# Altium PCB 2GHz_TDD_Driver.PcbDoc
Units mm, origin at the board's own origin, x right, y up, seen from the top; angles counter-clockwise.
Board outline 49.91 x 49.91 mm, 2 copper layers (Top Layer, Bottom Layer); 48 components, 28 nets, 151 pads, 10 vias.
Unrouted connection lines stored in the file: 23.
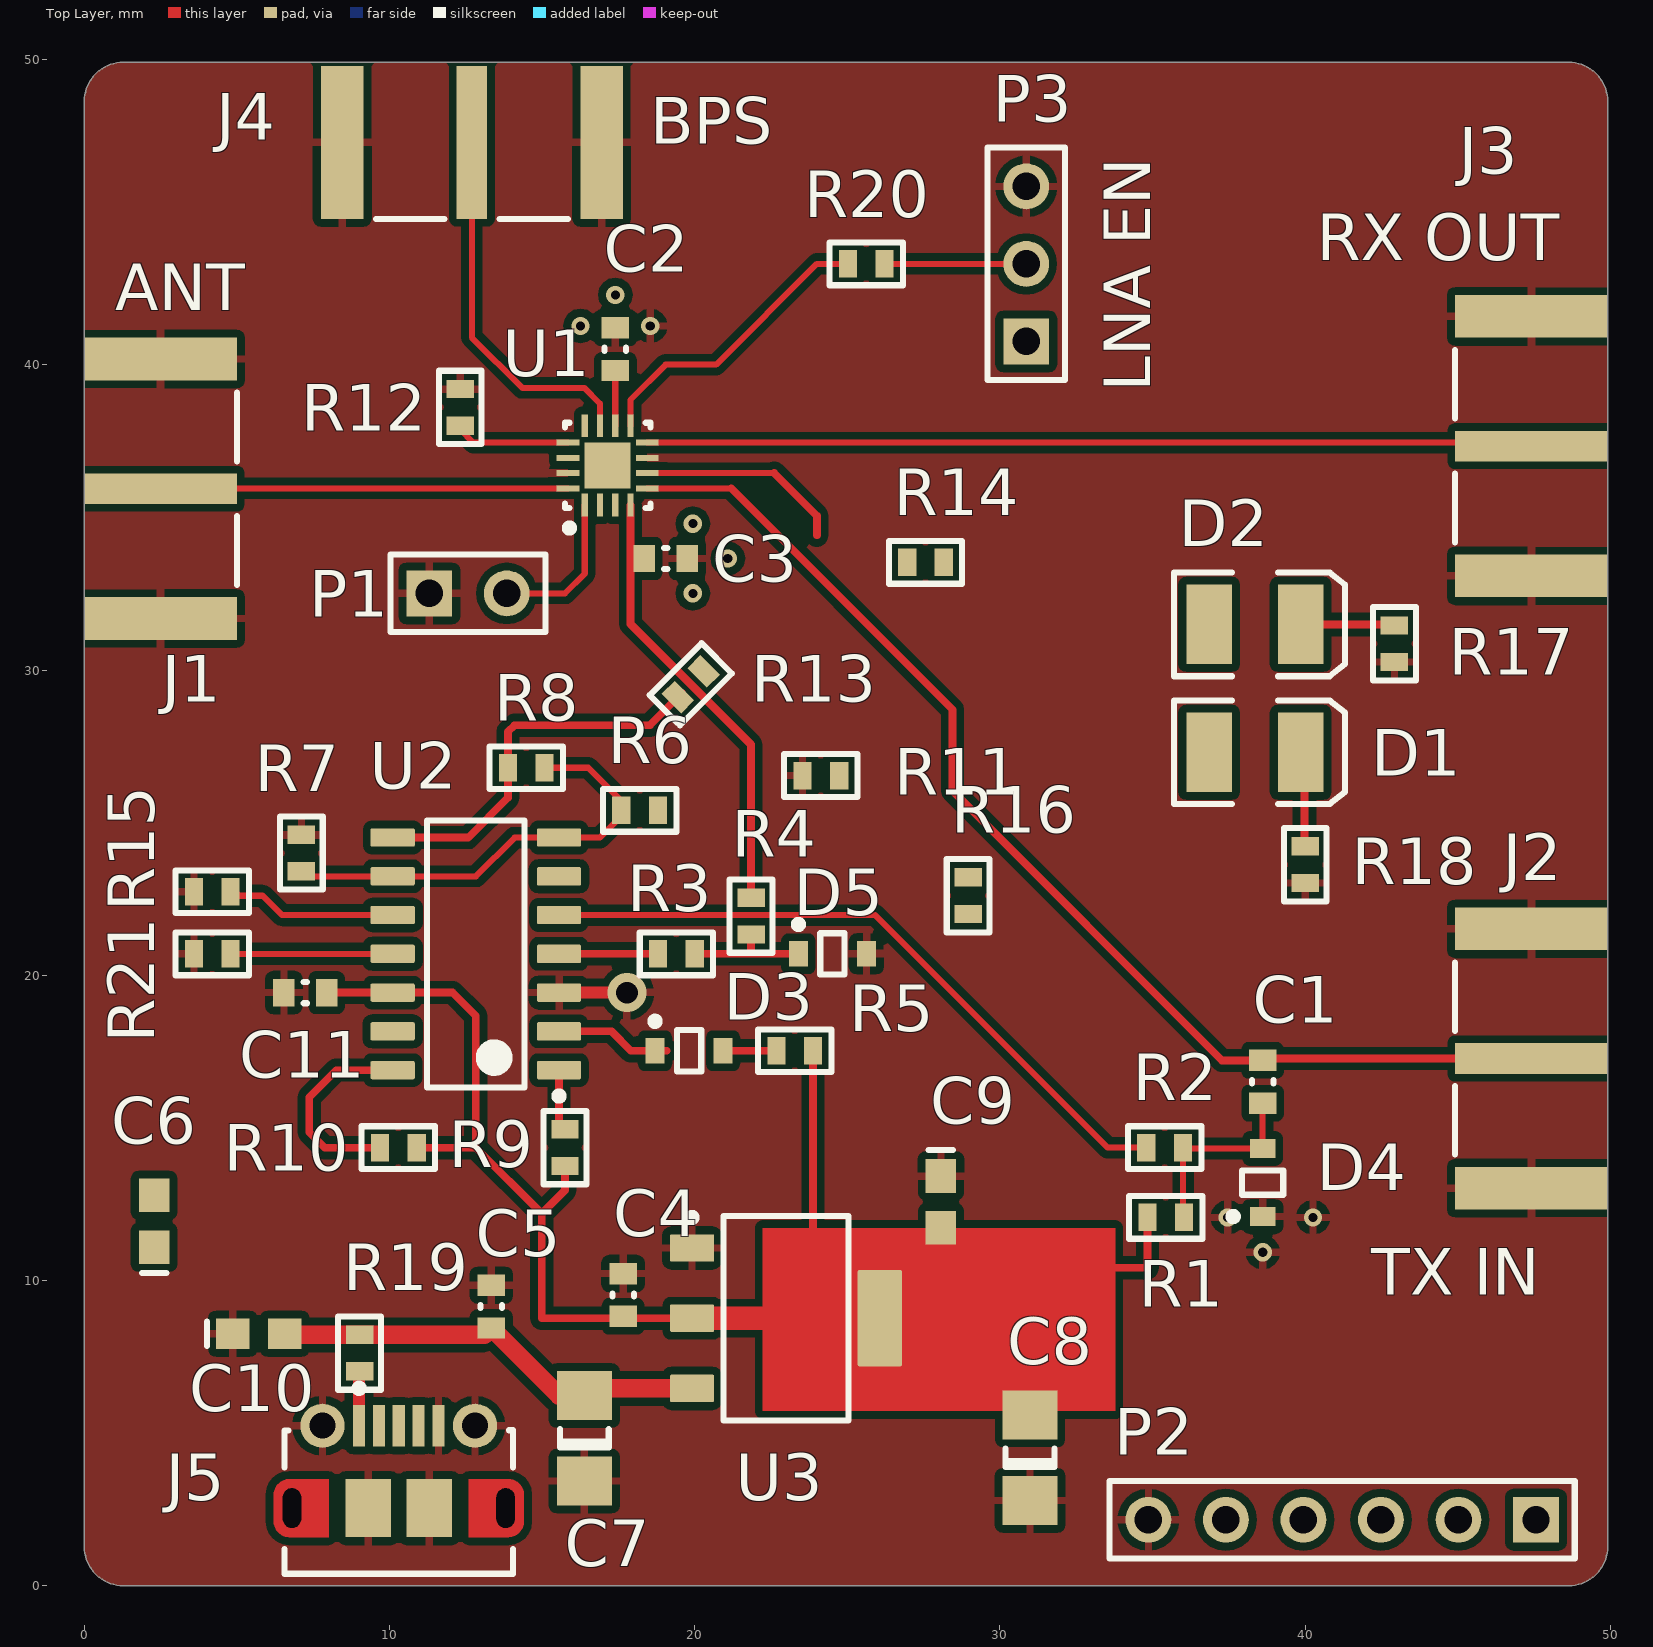
[diagram p0: Top Layer view]
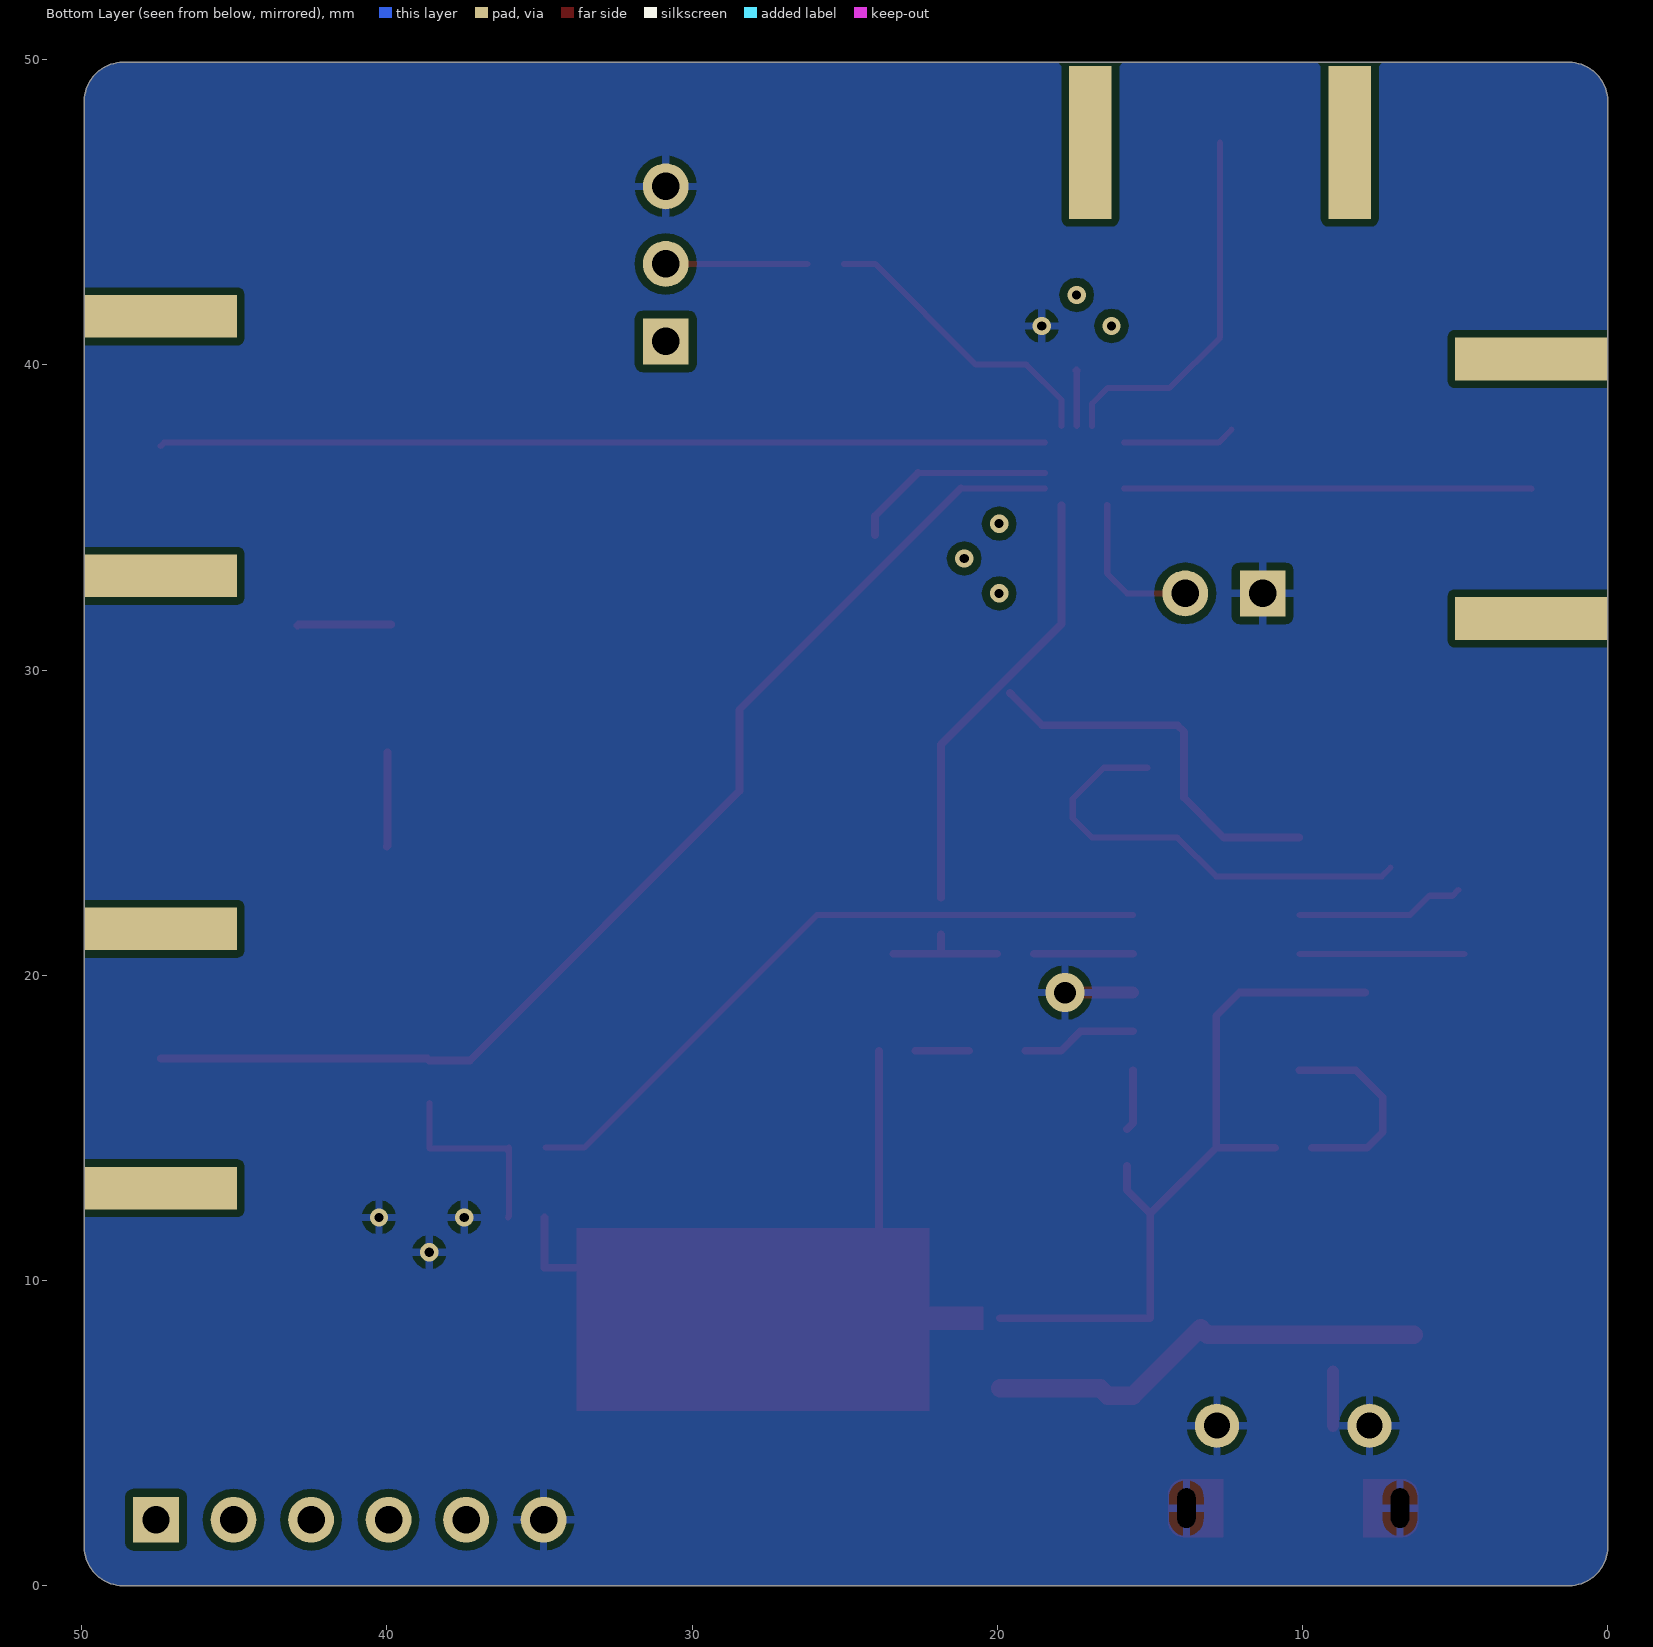
[diagram p1: Bottom Layer view, seen from below]

## Layer stack, top to bottom
Top Solder: solder mask 0.0102, Solder Resist, Dk 3.5
Top Layer: signal copper 0.0356
Dielectric 1: dielectric 0.32, FR-4, Dk 4.3
Bottom Layer: signal copper 0.0356
Bottom Solder: solder mask 0.0102, Solder Resist, Dk 3.5

## Board outline
0,1.27 0,48.641 cw(c1.27,48.641) 1.27,49.911 48.641,49.911 cw(c48.641,48.641) 49.911,48.641 49.911,1.27 cw(c48.641,1.27) 48.641,0 1.27,0 cw(c1.27,1.27)

## Design rules (kind name [scope] priority, off if disabled: settings)
Clearance [All] p1: gap=0.254 ignorepadtopadclearanceinfootprint=FALSE except(0: Arc-Hole Track-Hole SMDPad-Hole THPad-Hole Via-Hole Fill-Hole Poly-Hole Region-Hole Text-Hole; 0.15: Arc-Arc Arc-Track Arc-SMDPad Track-Track Track-SMDPad SMDPad-SMDPad)
PolygonConnect [All] p1: connectstyle=Relief reliefconductorwidth=0.254 reliefentries=4 polygonreliefangle="90 Angle" airgapwidth=0.254
RoutingVias [All] p1: holewidth=0.711 width=1.27 viastyle="Through Hole" minholewidth=0.711 minwidth=1.27 maxholewidth=0.711 maxwidth=1.27
SolderMaskExpansion [All] p1: expansion=0.102
Width [All] p1: maxlimit=3 minlimit=0.15 preferedwidth=0.254 bottomlayer_maxwidth=0.254 minimp=50.000000 maximp=50.000000 favimp=50.000000
30 further rules are at their usual default settings.

## Components (designator, comment, footprint, x,y, rotation, side; value= is the part's Value field where it differs from the comment)
C1 "CAP 1pF 50V 0603(1608)" CAPC0603(1608)100_L 38.608,16.51 r90 top value=1pF
C2 "100nF" CAPC0603(1608)100_L 17.399,40.513 r270 top
C3 "100nF" CAPC0603(1608)100_L 19.05,33.655 r0 top
C4 "100nF" CAPC0603(1608)100_L 17.653,9.525 r270 top
C5 "100nF" CAPC0603(1608)100_L 13.335,9.144 r270 top
C6 "C0603" 0603 2.286,11.938 r90 top value=100pF
C7 "C1206" 1206 16.383,4.826 r90 top value=22uF
C8 "C1206" 1206 30.988,4.191 r90 top value=22uF
C9 "C0603" 0603 28.067,12.573 r270 top value=2.2uF
C10 "C0603" 0603 5.715,8.255 r0 top value=470pF
C11 "100nF" CAPC0603(1608)100_L 7.239,19.431 r0 top
D1 "LED3" 3.5X2.8X1.9 38.354,27.305 r0 top
D2 "LED3" 3.5X2.8X1.9 38.354,31.496 r0 top
D3 "BAS16HT1G" ONSC-SOD-323-2-477-02_V 19.812,17.526 r0 top
D4 "MMDL301T1G" ONSC-SOD-323-2-477-02_V 38.608,13.208 r90 top
D5 "MMDL301T1G" ONSC-SOD-323-2-477-02_V 24.511,20.701 r0 top
J1 "32K145-400L5" ROS-32K145-400L5_V 0,35.941 r90 top
J2 "32K145-400L5" ROS-32K145-400L5_V 49.911,17.272 r270 top
J3 "32K145-400L5" ROS-32K145-400L5_V 49.911,37.338 r270 top
J4 "32K145-400L5" ROS-32K145-400L5_V 12.7,49.784 r0 top
J5 "105017-0001" USB-MICRO-B_V 10.303,3.89 r0 top locked
P1 "DET OUT" HDR1X2 11.303,32.512 r0 top
P2 "Header 6" HDR1X6 47.563,2.159 r180 top
P3 "LNA ENABLE" HDR1X3 30.861,40.767 r90 top
R1 "10k 0603" R0603 35.433,12.065 r0 top value=10k
R2 "10k 0603" R0603 35.398,14.351 r180 top value=10k
R3 "10k 0603" R0603 19.396,20.701 r180 top value=10k
R4 "10k 0603" R0603 21.844,21.936 r270 top value=10k
R5 "10k 0603" R0603 23.276,17.526 r0 top value=10k
R6 "10k 0603" R0603 18.196,25.4 r180 top value=10k
R7 "10k 0603" R0603 7.112,24.003 r270 top value=10k
R8 "10k 0603" R0603 14.478,26.797 r180 top value=10k
R9 "10k 0603" R0603 15.748,14.351 r270 top value=10k
R10 "10k 0603" R0603 10.287,14.351 r180 top value=10k
R11 "1M 0603" R0603 24.13,26.543 r0 top value=1M
R12 "10k 0603" R0603 12.319,38.608 r90 top value=10k
R13 "0R 0603" R0603 19.87,29.533 r45 top value=0R
R14 "0R 0603" R0603 27.559,33.528 r180 top
R15 "10k 0603" R0603 4.191,22.733 r0 top value=10k
R16 "100R 0603 1%" R0603 28.956,22.606 r90 top value=100R
R17 "100R 0603 1%" R0603 42.926,30.861 r90 top value=100R
R18 "100R 0603 1%" R0603 40.005,23.622 r270 top value=100R
R19 "0R 0603 1%" R0603 9.017,7.62 r270 top value=0R
R20 "10k 0603 1%" R0603 25.619,43.307 r0 top value=10k
R21 "10k 0603" R0603 4.191,20.701 r0 top value=10k
U1 "RFX8422S" QFN50P250X250X50_HS-17M 17.145,36.703 r90 top
U2 "LM339M" D0014A_N 12.827,20.701 r180 top locked
U3 "LM1117MPX-3.3" DCY0004A_L 22.987,8.763 r0 top locked

## Footprints (in the part's own frame and the unit in brackets; to place one, negate y for a bottom-side part, rotate by r counter-clockwise, add the part's x,y. Pads: shape width x height; smd on the part's side, far side on the other; paste and mask are expansions set on the pad)
3.5X2.8X1.9 [mm] "SM LED; 2 C-Bend Leads; Body 3.5 x 2.8 x 1.9 mm, inc leads (LxWxH typ)"
  rect 1.5x2.6 smd: 1(-1.5,0) 2(1.5,0)
  silkscreen extent -2.65,-1.7 2.95,1.7
0603 [mm] "Chip Capacitor; Body 1.6 x 0.8 mm (LxW typ)"
  rect 1.1x1 smd: 1(-0.85,0) 2(0.85,0)
  silkscreen extent -1.7,-0.4 -1.7,0.4
1206 [mm] "Chip Capacitor; Body 3.2 x 1.6 mm (LxW typ)"
  rect 1.6x1.8 smd: 1(-1.4,0) 2(1.4,0)
  silkscreen extent -0.3,-0.8 0.3,0.8
CAPC0603(1608)100_L [mm] "Chip Capacitor, Body 1.6x0.8mm, Height 1.0mm, IPC High Density"
  rect 0.7x0.9 smd: 1(-0.7,0) 2(0.7,0)
  silkscreen extent -0.05,-0.35 0.05,0.35, body extent -0.87,-0.47 0.88,0.48, height 1
D0014A_N [mm] "SOIC, 14-Leads, Body 8.75x4mm, Pitch 1.27mm, IPC Medium Density"
  rrect17% 1.45x0.6 smd: 1(-2.725,3.81) 2(-2.725,2.54) 3(-2.725,1.27) 4(-2.725,0) 5(-2.725,-1.27) 6(-2.725,-2.54) 7(-2.725,-3.81) 8(2.725,-3.81) 9(2.725,-2.54) 10(2.725,-1.27) 11(2.725,0) 12(2.725,1.27) 13(2.725,2.54) 14(2.725,3.81)
  silkscreen extent -2.85,-4.38 1.6,4.78, body extent -3.02,-4.32 3.02,4.32, height 1.59
DCY0004A_L [mm] "SOT223, 4-Leads, Body 6.7x3.7mm, Pitch 2.3mm, IPC High Density"
  rrect11% 1.45x0.9 smd: 1(-3.075,2.3) 2(-3.075,0) 3(-3.075,-2.3)
  rrect7% 1.45x3.15 smd: 4(3.075,0)
  silkscreen extent -3.2,-3.35 2.05,3.42, body extent -3.5,-3.25 3.5,3.25, height 1.62
HDR1X2 [mm] "Connector; Header; 2 Position"
  rect 1.5x1.5 hole 0.9: 1(0,0)
  round 1.5 hole 0.9: 2(2.54,0)
  silkscreen extent -1.27,-1.27 3.81,1.27
HDR1X3 [mm] "Connector; Header; 3 Position"
  rect 1.5x1.5 hole 0.9: 1(0,0)
  round 1.5 hole 0.9: 2(2.54,0) 3(5.08,0)
  silkscreen extent -1.27,-1.27 6.35,1.27
HDR1X6 [mm] "Connector; Header; 6 Position"
  rect 1.5x1.5 hole 0.9: 1(0,0)
  round 1.5 hole 0.9: 2(2.54,0) 3(5.08,0) 4(7.62,0) 5(10.16,0) 6(12.7,0)
  silkscreen extent -1.27,-1.27 13.97,1.27
ONSC-SOD-323-2-477-02_V [mm] "SOD, 2-Leads, Body 1.7x1.25mm"
  rect 0.63x0.83 smd: 1(-1.115,0) 2(1.115,0)
  silkscreen extent -1.24,-0.67 0.4,1.09, body extent -0.85,-0.63 0.85,0.63, height 1.06
QFN50P250X250X50_HS-17M [mm] "QFN, 16-Leads, Body 2,50x2,50mm, Pitch 0,50mm, Thermal Pad 1,50x1,50mm, IPC Low Density"
  rect 0.75x0.2 smd: 1(-1.3,0.75) 2(-1.3,0.25) 3(-1.3,-0.25) 4(-1.3,-0.75) 9(1.3,-0.75) 10(1.3,-0.25) 11(1.3,0.25) 12(1.3,0.75)
  rect 0.2x0.75 smd: 5(-0.75,-1.3) 6(-0.25,-1.3) 7(0.25,-1.3) 8(0.75,-1.3) 13(0.75,1.3) 14(0.25,1.3) 15(-0.25,1.3) 16(-0.75,1.3)
  rect 1.5x1.5 smd: 17(0,0)
  silkscreen extent -2.17,-1.4 1.4,1.4, body extent -1.3,-1.3 1.3,1.3, height 0.5
R0603 [mm]
  rect 0.6x0.9 smd: 1(-0.6,0) 2(0.6,0)
  silkscreen extent -1.2,-0.7 1.2,0.7
ROS-32K145-400L5_V [mm] "SMA Right Angle Jack, Edge Mount, 14.25x9.5x4.46mm, Rosenberger Recommended"
  rect 1x5 smd: 1(0,-2.5)
  rect 1.4x5 smd: MP(-4.25,-2.5) MP(4.25,-2.5)
  rect 1.4x5 smd far side paste-2: ""(-4.25,-2.5) ""(4.25,-2.5)
  silkscreen extent -3.15,-5 3.15,-5, body extent -4.75,-4.75 4.75,9.5, height 4.46
USB-MICRO-B_V [mm] "USB, MICRO B, Body 7.491x4.695 mm, Pitch 0.65 mm"
  rect 0.4x1.35 smd: 1(-1.3,1.35) 2(-0.65,1.35) 3(0,1.35) 4(0.65,1.35) 5(1.3,1.35)
  round 1.45 hole 0.85: 6(-2.5,1.35) 7(2.5,1.35)
  rrect50% 0x0 hole 0.6 slot 1.3 at 90 deg: 8(-3.5,-1.35) 11(3.5,-1.35)
  rect 1.5x1.9 smd: 9(-1,-1.35) 10(1,-1.35)
  Top Layer circle w0.5: c-3.6,-1.8 r0.25
  Top Layer circle w0.5: c-3.6,-0.9 r0.25
  Top Layer circle w0.5: c3.6,-1.8 r0.25
  Top Layer circle w0.5: c3.6,-0.9 r0.25
  Top Layer region: -3.6,-1.8 -3.6,-0.9 -4.1,-0.9 -4.1,-1.8
  Top Layer region: 3.6,-0.9 3.6,-1.8 4.1,-1.8 4.1,-0.9
  Top Layer region: 2.3,-0.4 2.3,-2.3 3.6,-2.3 3.6,-0.4
  Top Layer region: -2.3,-2.3 -2.3,-0.4 -3.6,-0.4 -3.6,-2.3
  silkscreen extent -3.75,-3.5 3.75,2.7, body extent -4.1,-3.9 4.1,1.5, height 2.67

## Part data
C1: library part CMP-1035-00040-1, "CAP 1pF 50V ±0.25pF 0603 (1608 Metric) Thickness 1mm SMD", Case-EIA=0603, Case-Metric=1608, Rated Voltage="50 V", Tolerance=±0.25pF, Max Thickness="1 mm", Technology=SMT
C2 C3 C4 C5 C11: library part CMP-1035-02589-1, "CAP 100nF 25V ±20% 0603 (1608 Metric) Thickness 1mm SMD", Case-EIA=0603, Case-Metric=1608, Rated Voltage="25 V", Tolerance=±20%, Max Thickness="1 mm", Technology=SMT
C6 C7 C8 C9 C10: "Ceramic Chip Capacitor - Standard", PackageDocument=Mar-2001, ComponentLink1Description="Manufacturer Link", ComponentLink1URL=http://www.kemet.com/, ComponentLink2Description=Datasheet, ComponentLink2URL=http://www.kemet.com/kemet/web/homepage/kechome.nsf/vapubfilesname/F3102TA.pdf/$file/F3102TA.pdf, DatasheetDocument=Mar-2001, LatestRevisionDate=19-Mar-2004, LatestRevisionNote="Silkscreen size reduced.", Published=17-Jul-2002, Publisher="Altium Limited"
  C6 C9 C10: Code_IPC="1608 [0603]", Code_JEITA=0603, Note="Footprint corresponds to dimensions for bulk cassette packaging. This case size has tightened tolerances.", PackageReference=0603
  C7 C8: Code_IPC="3216 [1206]", Code_JEITA=1206, PackageReference=1206
D1 D2: "Typical BLUE SiC LED", DatasheetVersion=16-Apr-2002, LatestRevisionDate=17-Dec-2003, LatestRevisionNote="PCB Footprint replaced.", PackageDescription="SM LED; 2 C-Bend Leads; Body 3.5 x 2.8 x 1.9 mm, inc leads (LxWxH typ)", PackageReference=3.5X2.8X1.9, PackageVersion=16-Apr-2002, Published=8-Jun-2000, Publisher="Altium Limited"
D3: library part CMP-1054-00068-1, "Switching Diode, 2-Pin SOD-323, Pb-Free, Tape and Reel", Manufacturer="On Semiconductor", ComponentLink1Description="Manufacturer URL", ComponentLink1URL=http://www.onsemi.com/, ComponentLink2Description=Datasheet, ComponentLink2URL=http://www.onsemi.com/pub_link/Collateral/BAS16HT1-D.PDF, ComponentLink3Description="Package Specification", ComponentLink3URL=http://www.onsemi.com/pub_link/Collateral/477-02.PDF.1, Configuration=Single, DatasheetVersion="Rev. 11", IF Max (A)=0.2, Mounting Technology="Surface Mount", PackageDescription="2-Pin SOD, Body 1.7 x 1.25 mm", PackageReference=SOD-323-2-477-02, PackageVersion="Rev. H, 03/2007", Packing="Tape and Reel", PartNumber=BAS16HT1G, RoHS=TRUE, trr Max (ns)=6
D4 D5: library part CMP-1051-00017-1, "Silicon Hot-Carrier Diode, Schottky Barrier Diode, 2-Pin SOD-323, Pb-Free, Tape and Reel", Manufacturer="On Semiconductor", ComponentLink1Description="Manufacturer URL", ComponentLink1URL=http://www.onsemi.com/, ComponentLink2Description=Datasheet, ComponentLink2URL=http://www.onsemi.cn/pub_link/Collateral/MMDL301T1-D.PDF, ComponentLink3Description="Package Specification", ComponentLink3URL=http://www.onsemi.com/pub_link/Collateral/477-02.PDF.1, Configuration=Single, DatasheetVersion="Rev. 2", Mounting Technology="Surface Mount", PackageDescription="2-Pin SOD, Body 1.7 x 1.25 mm", PackageReference=SOD-323-2-477-02, PackageVersion="Rev. H, 03/2007", Packing="Tape and Reel", PartNumber=MMDL301T1G, RoHS=TRUE
J1 J2 J3 J4: "SMA Right Angle Jack, Edge Mount, Up to 18 GHz, -55 to 155 degC", ComponentLink1Description="Manufacturer URL", ComponentLink1URL=http://www.rosenberger.de, ComponentLink2Description=Datasheet, ComponentLink2URL=http://rosenberger.de/ok/images/documents/db/32K145-400L5.pdf, ComponentLink3Description="Package Specification", ComponentLink3URL=http://rosenberger.de/ok/images/documents/db/32K145-400L5.pdf, ComponentLink4Description="Series Overview / Design Note", ComponentLink4URL=http://rosenberger.de/ok/images/documents/spez/32.pdf, ComponentLink5Description="Webshop / RFQ", ComponentLink5URL=http://www.rosenberger.com/en/contact/sales/, DatasheetVersion=b00, Desgin Note 2="For more information about DRC setting, please look at following webpage, http://techdocs.altium.com/display/SCRT/Design+Rule+for+Edge-Mount+Connectors", Design Note 1="Footprint in library is a generic example - only application specific footprint delivers High Performance", Mounting Technology="Surface Mount", PackageDescription="SMA Right Angle Jack, Edge Mount, 14.25 x 9.5 x 4.46 mm", PackageReference=32K145-400L5, PackageVersion=b00, PartNumber=32K145-400L5
J5: library part CMP-2000-05827-1, "Micro-USB B Receptacle, Right Angle, Bottom Mount, Surface Mount, with Solder Tabs, -30 to 85 degC, 5-Pin USB, RoHS, Tape and Reel", Manufacturer=Molex, Package Description="5-Leads USB, Micro B, Body 7.5 x 5 mm, Pitch 0.65 mm", Package Reference=MICRO-B, Package Version="Rev. F, 12/2012", Standard Package=1, Voltage - Max=30V, 3D Model=105017-0001.stp, Catalog Drawings=1050170001, Category=Connectors,Interconnects, Circuits=5, Connector Type=USB-microB, Datasheet URL=http://www.molex.com/elqNow/elqRedir.htm?ref=http://www.molex.com/webdocs/datasheets/pdf/en-us/1050170001_IO_CONNECTORS.pdf, Datasheet Version=03/2016, Family=USB,DVI,HDMIConnectors, Featured Product=Micro-USBConnectorsUSBConnectors, Features=Shielded,SolderRetention, Gender=Receptacle, Ingress Protection=-, Manufacturer URL=http://www.molex.com/, Mating Products=WM17145-ND-CABLEMICROUSBBTOSTDA1.0MWM17147-ND-CABLEMICROUSBBTOSTDA2.0MWM17146-ND-CABLEMICROUSBBTOSTDA1.5M, Mounting Technology=SurfaceMount, Mounting Type=BoardCutout,SurfaceMount,RightAngle, Number of Contacts=5, Online Catalog=Molex-MicroUSB, Other Names=WM1399DKR, Package URL=http://www.molex.com/pdm_docs/sd/1050170001_sd.pdf, Packaging=Digi-Reel®, PCN Assembly/Origin=ResinSupplier21/Oct/2015, RoHS Information=1050170001CertofCompliance, Series=-, Specifications=-
P1: library part "Header 2", "Header, 2-Pin", LatestRevisionDate=17-Jul-2002, LatestRevisionNote="Re-released for DXP Platform.", Publisher="Altium Limited"
P2: "Header, 6-Pin", LatestRevisionDate=17-Jul-2002, LatestRevisionNote="Re-released for DXP Platform.", Publisher="Altium Limited"
P3: library part "Header 3", "Header, 3-Pin", LatestRevisionDate=17-Jul-2002, LatestRevisionNote="Re-released for DXP Platform.", Publisher="Altium Limited"
R1 R2 R3 R4 R5 R6 R7 R8 R9 R10 R12 R15 R21: "10k 0603 1% resistor", Case="0603 Imperial", Publisher=iv
R11: library part "0R 0603", "1M 0603 1%", Case=0603
R13: "0R 0603 1%", Case=0603
R14: "0R 0603 1%"
R16 R17 R18: library part "100R 0603", Case=0603, Tolerance=1%, Publisher=iv
R19: library part "0R 0603", Case=0603, Tolerance=1%, Publisher=iv
R20: library part "10k 0603", "10k 0603 1% resistor", Case="0603 Imperial", Tolerance=1%, Publisher=iv
U1: "2.4GHZ PA+LNA+SW +21dBm", Manufacturer="Skyworks Solutions", Supplier Part Number 1=477-RFX8422S, Manufacturer Part Number=RFX8422S, Stock 1=0, Supplier 1=Mouser
U2: library part CMP-0055-00762-3, "Low Power Low Offset Voltage Quad Comparator, 14-pin Narrow SOIC", Manufacturer="Texas Instruments", Package Reference=D0014A, PackageTopMarking=NSUZXYTTE#*LM339M, PowerWise=N, Code_IPC=SOIC127P600-14, Code_JEDEC=MS-012AB, ComponentLink1Description="Datasheet URL", ComponentLink1URL=http://www.ti.com/general/docs/lit/getliterature.tsp?genericPartNumber=LM339-N&fileType=pdf, CompType=Amplifiers, PackageDescription="Molded Package S.O., .150in Wide, 14 Lead", PinCount=14, RoHS=N
U3: library part CMP-0062-01659-4, "800mA Low-Dropout Linear Regulator, 4-pin SOT-223", Manufacturer="Texas Instruments", PackageTopMarking=XYTT*N05A, PowerWise=N, Code_IPC=SOT223-4, Code_JEDEC=TO-261-AA, ComponentLink1Description="Datasheet URL", ComponentLink1URL=http://www.ti.com/general/docs/lit/getliterature.tsp?genericPartNumber=LM1117-N&fileType=pdf, CompType="LDO IC", High-Reliability=Y, PackageDescription="Molded SOT-223, 6.50 x 3.56 x 1.6mm Body, 4 Lead, 2.3mm Pitch", PackageReference=DCY0004A, PartNumber=LM1117MPX-3.3, PinCount=4, RoHS=N

## Via types
v1: diameter 0.6, hole 0.3, Top Layer to Bottom Layer, 9 vias
v2: diameter 1.27, hole 0.711, Top Layer to Bottom Layer, 1 vias

## Nets (pads, with @x,y where several pads share a name; then routed paths per layer and width w, separated by ;. In a path a pad name is that pad's centre, name@x,y a point inside that pad or via, vN(x,y) a via of type N, cw(c..) or ccw(c..) an arc to the next point about the centre after c; other vN are vias at no path point)
3.3VDC: C2.2 C3.1 C4.2 C6.2 C8.2 C9.2 C11.2 P3.1 R1.1 R4.1 R5.2 R6.1 R9.2 R10.1 U1.4 U1.10 U2.12 U3.2 U3.4 | length 59
  Top Layer w0.2: U1.10 C2.2@17.395,39.809
  Top Layer w0.254: C11.2 U2.12 12.065,19.431 12.827,18.669 12.827,14.351 ; R10.1 12.827,14.351 ; R9.2 15.748,12.954 14.986,12.192 ; C2.2@17.395,39.809 C2.2 ; U1.4 17.895,31.508 21.844,27.559 R4.1 ; U3.2 14.986,8.763 14.986,12.192 ; 23.622,10.795 23.876,11.049 R5.2 ; U3.4 27.686,8.763 29.337,10.414 34.833,10.414 R1.1 ; 12.827,14.351 14.986,12.192
DET: P1.2 P2.5 U1.1 | length 5.1
  Top Layer w0.2: P1.2 15.748,32.512 16.395,33.159 U1.1
GND: C2.1 C3.2 C4.1 C5.1 C7.1 C8.1 C9.1 C10.1 C11.1 D4.1 D5.2 J1.MP J2.MP J3.MP J4.MP J5.5 J5.6 J5.7 J5.8 J5.9 J5.10 J5.11 P1.1 P2.6 P3.3 R7.1 R11.1 R12.2 R15.1 R17.1 R18.2 R21.1 U1.7 U1.15 U1.17 U2.3 U3.1 | length 2.2
  Top Layer w0.4: U2.3 v2(17.78,19.431)
  other v1: 38.608,10.922 37.465,12.065 40.259,12.065 18.542,41.275
LNEN: P2.3 R20.1 U1.9 | length 9.8
  Top Layer w0.2: U1.9 17.895,38.85 19.05,40.005 20.701,40.005 24.003,43.307 R20.1
NetC1_1: C1.1 D4.2 R1.2 R2.1 | length 6.4
  Top Layer w0.2: R2.1 R2.1@35.998,14.224 ; R1.2 35.998,12.1 R2.1@35.998,14.224 ; C1.1 D4.2 36.097,14.323 R2.1@35.998,14.224
NetC1_2: C1.2 J2.1 U1.5 | length 38.3
  Top Layer w0.2: U1.5 21.197,35.953
  Top Layer w0.254: 21.197,35.953 28.448,28.702 28.448,26.035 37.273,17.21 C1.2 38.67,17.272 J2.1
NetC6_1: C6.1 R16.2 U2.6
NetD1_2: D1.2 R18.1 | length 3.1
  Top Layer w0.254: D1.2@39.981,27.305 39.981,24.246 R18.1
NetD2_2: D2.2 R17.2 | length 3.1
  Top Layer w0.254: D2.2 42.891,31.496 R17.2
NetD3_1: D3.1 U2.2 | length 3.8
  Top Layer w0.254: U2.2 17.272,18.161 17.907,17.526 D3.1 19.078,17.526
NetD3_2: D3.2 R5.1 R16.1 | length 1.7
  Top Layer w0.254: D3.2 R5.1
NetD5_1: D5.1 R3.1 R4.2 | length 4
  Top Layer w0.254: R3.1 21.844,20.701 ; R4.2 21.844,20.701 ; D5.1 21.844,20.701
NetJ1_1: J1.1 U1.16 | length 13.3
  Top Layer w0.2: J1.1 2.512,35.953 U1.16
NetJ3_1: J3.1 U1.8 | length 29
  Top Layer w0.2: U1.8 47.296,37.453 J3.1
NetJ4_1: J4.1 U1.11 | length 12.2
  Top Layer w0.2: J4.1 12.7,40.894 14.351,39.243 16.383,39.243 16.895,38.731 U1.11
NetJ5_1: J5.1 R19.2 | length 1.8
  Top Layer w0.2: R19.2@9.003,7.006 R19.2
  Top Layer w0.4: J5.1 R19.2@9.003,7.006
NetP3_2: P3.2 R20.2 | length 4.6
  Top Layer w0.2: R20.2 P3.2
NetR2_2: R2.2 U2.5 | length 22.4
  Top Layer w0.2: U2.5 25.908,21.971 33.528,14.351 R2.2
NetR3_2: R3.2 R11.2 U2.4 | length 3.2
  Top Layer w0.254: U2.4 R3.2
NetR6_2: R6.2 R7.2 R8.1 U2.7 U2.9 | length 14.8
  Top Layer w0.2: R7.2@7.112,23.53 7.401,23.241 U2.9 12.827,23.241 14.097,24.511 U2.7 16.891,24.511 17.526,25.146 17.526,25.781 16.51,26.797 R8.1
NetR8_2: R8.2 R9.1 R13.1 U2.1 U2.8 | length 14.7
  Top Layer w0.254: U2.8 12.573,24.511 13.878,25.816 R8.2 13.878,27.975 14.097,28.194 18.53,28.194 R13.1 R13.1@19.584,29.248 ; U2.1 15.552,15.147 R9.1
NetR10_2: R10.2 R14.1 U2.14 | length 6.8
  Top Layer w0.254: R10.2 7.874,14.351 7.366,14.859 7.366,16.002 8.255,16.891 U2.14
NetR12_1: R12.1 U1.13 | length 3.7
  Top Layer w0.2: R12.1@12.319,37.881 12.747,37.453 U1.13
NetR15_2: R15.2 U2.10 | length 5.6
  Top Layer w0.2: R15.2@4.889,22.796 5.08,22.606 5.842,22.606 6.477,21.971 U2.10
NetR21_2: R21.2 U2.11 | length 5.4
  Top Layer w0.2: R21.2@4.699,20.701 R21.2 U2.11
RXEN: D2.1 P2.2 R14.2 U1.14
TXEN: D1.1 P2.4 R13.2 U1.6 | length 6.8
  Top Layer w0.2: U1.6 22.602,36.453
  Top Layer w0.254: 22.602,36.453 24.003,35.052 24.003,34.417
VCC: C5.2 C7.2 C10.2 P2.1 R19.1 U3.3 | length 14.7
  Top Layer w0.2: C10.2@6.35,8.216 C10.2@6.354,8.22
  Top Layer w0.6: C10.2@6.354,8.22 R19.1 13.111,8.22 C5.2 15.553,6.226 C7.2 16.62,6.463 U3.3
pads on no net: J1. J2. J3. J4. J5.2 J5.3 J5.4 U1.2 U1.3 U1.12 U2.13
copper on no net:
  other v1: 19.939,32.512 21.082,33.655 19.939,34.798 16.256,41.275 17.399,42.291

## Polygon pours and split planes (outlines as drawn)
GND on Top Layer "Top Layer-GND" (solid, pour order 0): 0,1.27 0,48.641 cw(c1.27,48.641) 1.27,49.911 48.641,49.911 cw(c48.641,48.641) 49.911,48.641 49.911,1.27 cw(c48.641,1.27) 48.641,0 1.27,0 cw(c1.27,1.27)
GND on Bottom Layer "Top Layer-GND" (solid, pour order 1): 0,1.27 0,48.641 cw(c1.27,48.641) 1.27,49.911 48.641,49.911 cw(c48.641,48.641) 49.911,48.641 49.911,1.27 cw(c48.641,1.27) 48.641,0 1.27,0 cw(c1.27,1.27)

## Other copper
Top Layer:
  rectangle net 3.3VDC: 22.225,5.715 33.782,11.723
  rectangle net 3.3VDC: 20.447,8.382 33.782,9.144

## Silkscreen, mask and mechanical layers (free items; w line width, h text height)
Top Overlay:
  text "BPS" at 18.542,47.244 h1.52
  text "RX OUT" at 40.386,43.434 h1.52
  text "ANT" at 1.016,41.783 h1.52
  text "LNA EN" at 34.925,39.116 h1.52 r90
  text "TX IN" at 42.164,9.525 h1.52
Mechanical 1:
  lines w0.1: 0,1.27 ccw(c1.27,1.27) 1.27,0 48.641,0 ccw(c48.641,1.27) 49.911,1.27 49.911,48.641 ccw(c48.641,48.641) 48.641,49.911 1.27,49.911 ccw(c1.27,48.641) 0,48.641 0,46.99 0,44.704 0,5.842 0,1.27

## Dimensions
1.27,0 to 1.27,49.911 on Mechanical 13
49.911,48.641 to 0,48.641 on Mechanical 13

## Text inside footprints (layer, text, board x,y; h text height)
J1: Mechanical 3 "Board Edge" at 0,27.841 h0.2 r90
J2: Mechanical 3 "Board Edge" at 49.911,25.372 h0.2 r270
J3: Mechanical 3 "Board Edge" at 49.911,45.438 h0.2 r270
J4: Mechanical 3 "Board Edge" at 4.6,49.784 h0.2
J5: Mechanical 1 "PCB EDGE" at 3.103,0.99 h0.3